# EAGLE board T35_ROMBOARD_V1.00 (EAGLE 6.4)
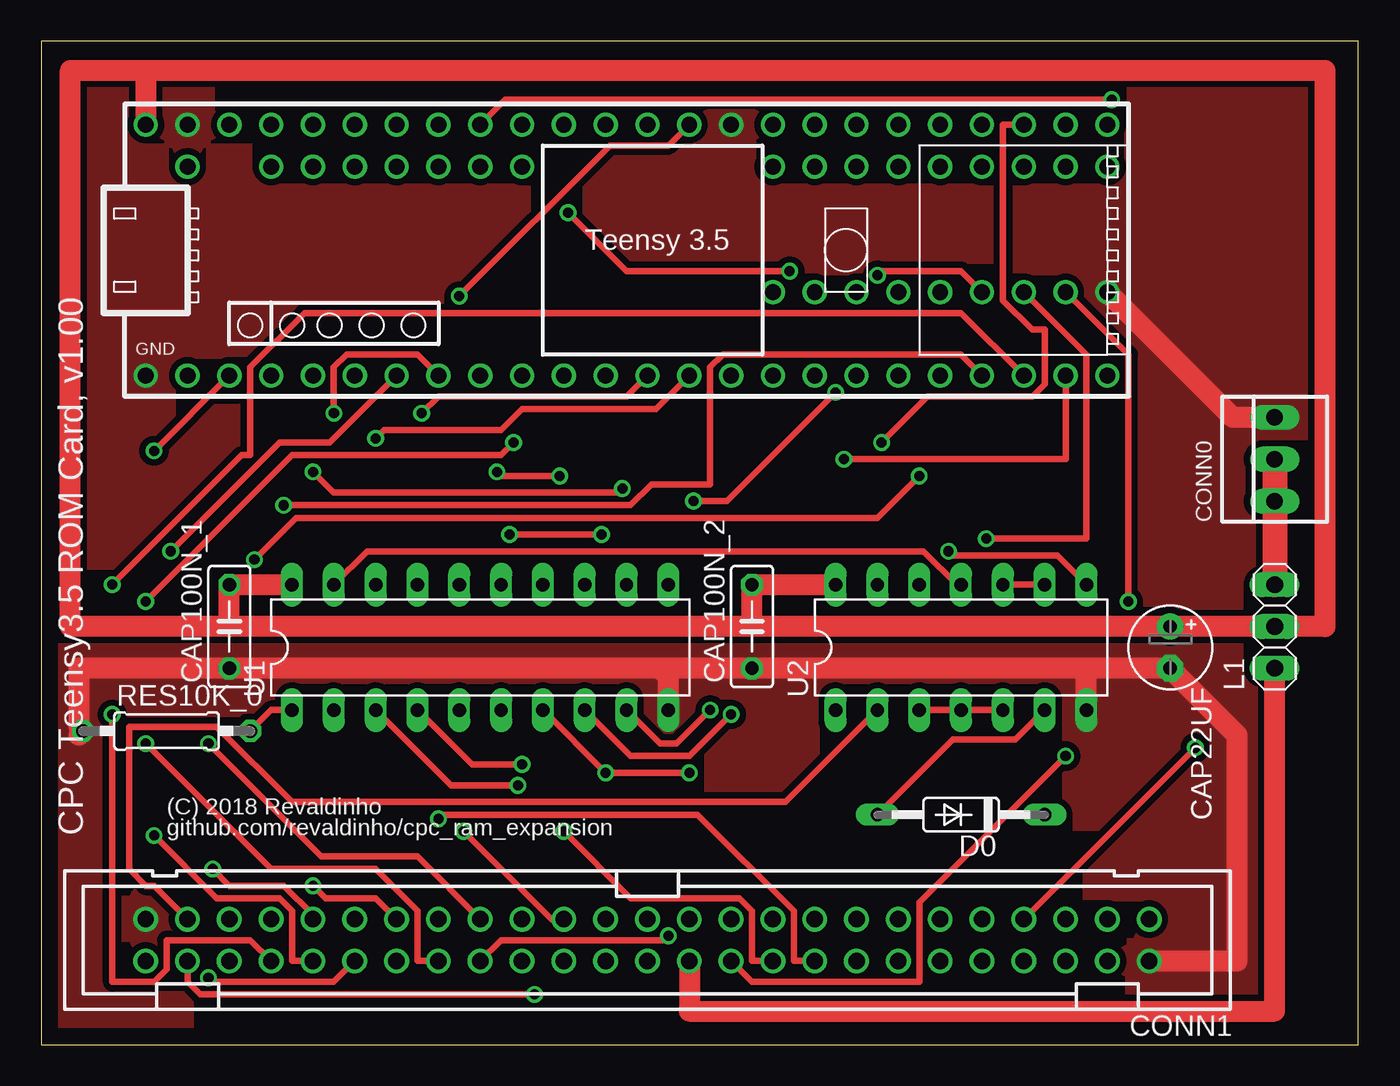
[diagram p0: board, top side]
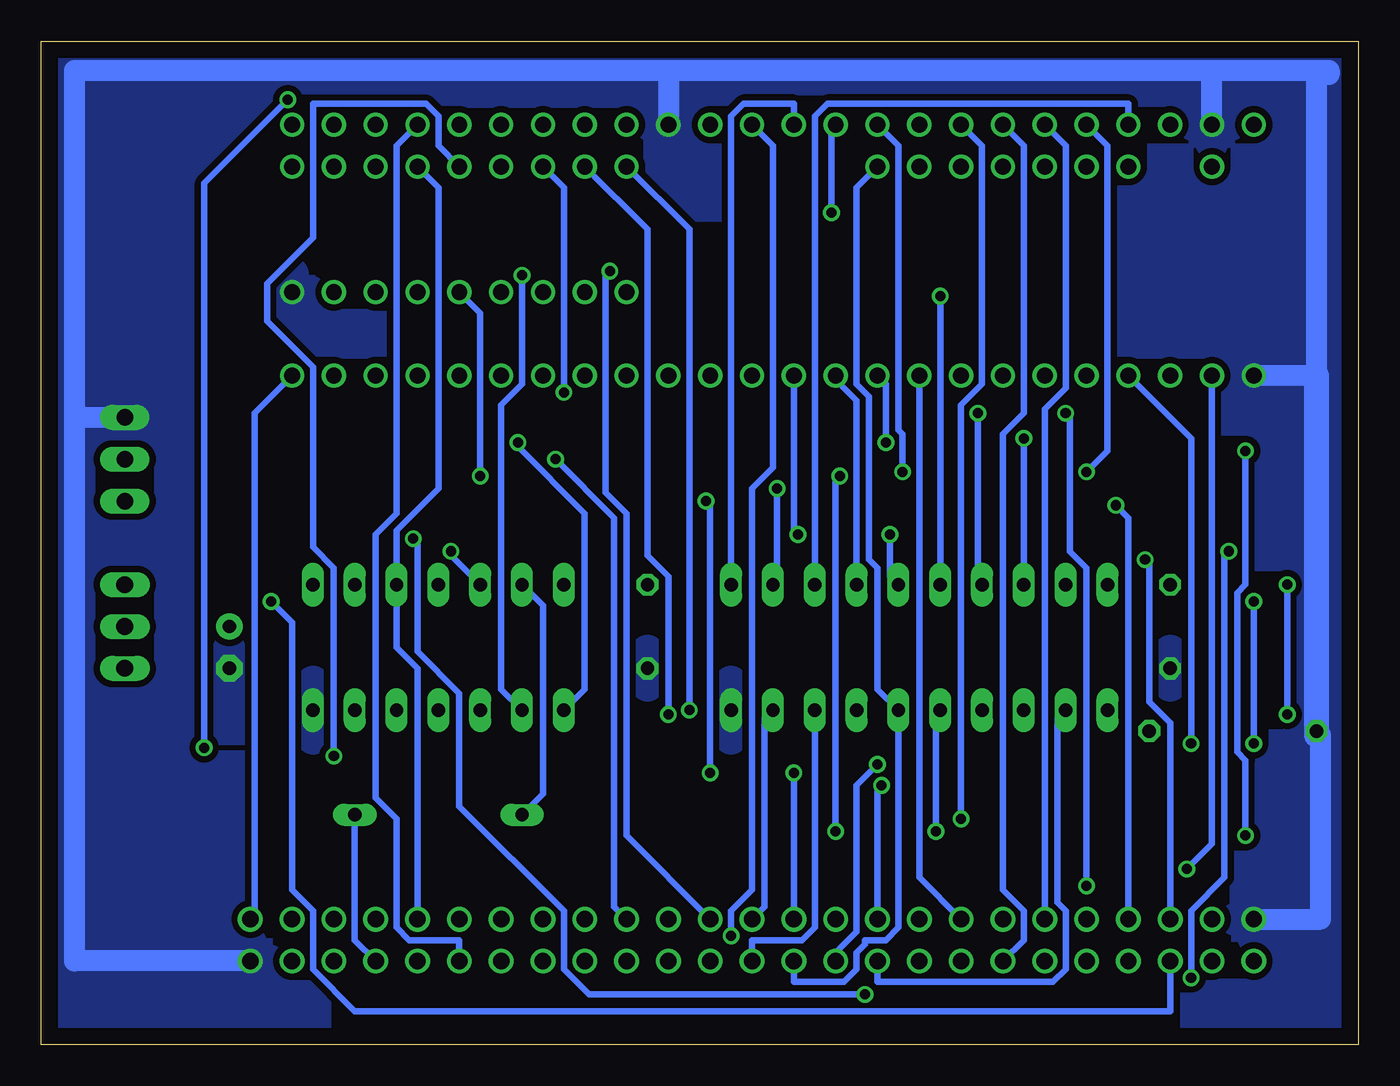
[diagram p1: board, bottom side, seen from below]

Size 80.01 x 60.96 mm. Coordinates in mm from the lower left corner, seen from the top.
Outline: 0,0 80.01,0 80.01,60.96 0,60.96 0,0
Copper layers (1*16): Top 0.035mm / dielectric 1.5mm / Bottom 0.035mm
Design rules "default": minimum track width 10mil, minimum drill 24mil, track to track 8mil, track to pad 8mil, pad to pad 8mil, via to via 8mil, smd to smd 8mil, copper to edge 40mil, drill to drill 8mil, minimum pad ring 10mil, minimum via ring 8mil, stop-mask expansion 4mil, vias tented up to drill 0mil, thermal gap 10mil
Net classes: 0 signal: width 0.381 mm, clearance 0.254 mm; 1 supply: width 1.016 mm, clearance 0.381 mm

## Footprints (pad centres in the part's own frame; a part is rotated, then mirrored left to right if it is on the bottom)
E2,5-5 = drill 0.813 pad 1.6: + -1.27,0 | drill 0.813 pad 1.6 octagon: - 1.27,0
C050-025X075 = drill 0.813 octagon: 1 -2.54,0; 2 2.54,0
22-23-2031 = drill 1 long: 1 -2.54,0; 2 0,0; 3 2.54,0
PAK100/2500-50 = drill 1 pad 1.422: 1 -30.48,-1.27; 2 -30.48,1.27; 3 -27.94,-1.27; 4 -27.94,1.27; 5 -25.4,-1.27; 6 -25.4,1.27; 7 -22.86,-1.27; 8 -22.86,1.27; 9 -20.32,-1.27; 10 -20.32,1.27; 11 -17.78,-1.27; 12 -17.78,1.27; 13 -15.24,-1.27; 14 -15.24,1.27; 15 -12.7,-1.27; 16 -12.7,1.27; 17 -10.16,-1.27; 18 -10.16,1.27; 19 -7.62,-1.27; 20 -7.62,1.27; 21 -5.08,-1.27; 22 -5.08,1.27; 23 -2.54,-1.27; 24 -2.54,1.27; 25 0,-1.27; 26 0,1.27; 27 2.54,-1.27; 28 2.54,1.27; 29 5.08,-1.27; 30 5.08,1.27; 31 7.62,-1.27; 32 7.62,1.27; 33 10.16,-1.27; 34 10.16,1.27; 35 12.7,-1.27; 36 12.7,1.27; 37 15.24,-1.27; 38 15.24,1.27; 39 17.78,-1.27; 40 17.78,1.27; 41 20.32,-1.27; 42 20.32,1.27; 43 22.86,-1.27; 44 22.86,1.27; 45 25.4,-1.27; 46 25.4,1.27; 47 27.94,-1.27; 48 27.94,1.27; 49 30.48,-1.27; 50 30.48,1.27
DO35-10 = drill 0.813 long: A 5.08,0; C -5.08,0
1X03 = drill 1.016 long: 1 -2.54,0; 2 0,0; 3 2.54,0
0207/10 = drill 0.813 octagon: 1 -5.08,0; 2 5.08,0
TEENSY_35_NOXPINS = drill 0.965: 3V3 7.62,-7.62; 3V3_1 30.48,5.08; 3V3_250MA -22.86,7.62; 28 20.32,-7.62; A10 -17.78,5.08; A11 -15.24,5.08; AGND -25.4,7.62; AREF -20.32,5.08; DAC0 12.7,7.62; DAC1 10.16,7.62; GND -27.94,-7.62; GND2 7.62,7.62; GND5 30.48,-2.54; NC1 17.78,5.08; NC2 17.78,-2.54; P0 -25.4,-7.62; P1 -22.86,-7.62; P2 -20.32,-7.62; P3 -17.78,-7.62; P4 -15.24,-7.62; P5 -12.7,-7.62; P6 -10.16,-7.62; P7 -7.62,-7.62; P8 -5.08,-7.62; P9 -2.54,-7.62; P10 0,-7.62; P11 2.54,-7.62; P12 5.08,-7.62; P13 5.08,7.62; P14 2.54,7.62; P15 0,7.62; P16 -2.54,7.62; P17 -5.08,7.62; P18 -7.62,7.62; P19 -10.16,7.62; P20 -12.7,7.62; P21 -15.24,7.62; P22 -17.78,7.62; P23 -20.32,7.62; P24 10.16,-7.62; P25 12.7,-7.62; P26 15.24,-7.62; P27 17.78,-7.62; P29 22.86,-7.62; P30 25.4,-7.62; P31 27.94,-7.62; P32 30.48,-7.62; P33 30.48,7.62; P34 27.94,7.62; P35 25.4,7.62; P36 22.86,7.62; P37 20.32,7.62; P38 17.78,7.62; P39 15.24,7.62; P40 10.16,-2.54; P41 12.7,-2.54; P42 15.24,-2.54; P43 20.32,-2.54; P44 22.86,-2.54; P45 25.4,-2.54; P46 27.94,-2.54; P47 27.94,5.08; P48 25.4,5.08; P49 22.86,5.08; P50 20.32,5.08; P51 15.24,5.08; P52 12.7,5.08; P53 10.16,5.08; P54 -5.08,5.08; P55 -7.62,5.08; P56 -10.16,5.08; P57 -12.7,5.08; VIN -27.94,7.62; VUSB -25.4,5.08
DIL20 = drill 0.813 long: 1 -11.43,-3.81; 2 -8.89,-3.81; 3 -6.35,-3.81; 4 -3.81,-3.81; 5 -1.27,-3.81; 6 1.27,-3.81; 7 3.81,-3.81; 8 6.35,-3.81; 9 8.89,-3.81; 10 11.43,-3.81; 11 11.43,3.81; 12 8.89,3.81; 13 6.35,3.81; 14 3.81,3.81; 15 1.27,3.81; 16 -1.27,3.81; 17 -3.81,3.81; 18 -6.35,3.81; 19 -8.89,3.81; 20 -11.43,3.81
DIL14 = drill 0.813 long: 1 -7.62,-3.81; 2 -5.08,-3.81; 3 -2.54,-3.81; 4 0,-3.81; 5 2.54,-3.81; 6 5.08,-3.81; 7 7.62,-3.81; 8 7.62,3.81; 9 5.08,3.81; 10 2.54,3.81; 11 0,3.81; 12 -2.54,3.81; 13 -5.08,3.81; 14 -7.62,3.81

## Placement (x,y rotation side)
CAP22UF  [E2,5-5]  68.58,24.13 270 top
CAP100N_1  [C050-025X075]  11.43,25.4 90 top
CAP100N_2  [C050-025X075]  43.18,25.4 90 top
CONN0  [22-23-2031]  74.93,35.56 90 top
CONN1  [PAK100/2500-50]  36.83,6.35 180 top
D0  [DO35-10]  55.88,13.97 180 top
L1  [1X03]  74.93,25.4 90 top
RES10K_0  [0207/10]  7.62,19.05 0 top
U0  [TEENSY_35_NOXPINS]  34.29,48.26 0 top
U1  [DIL20]  26.67,24.13 0 top
U2  [DIL14]  55.88,24.13 0 top

## Library data of the parts
CAP22UF CAP100N_1 CAP100N_2 RES10K_0 = resistor
CONN0 = con-molex
CONN1 = con-3m
D0 = diode
L1 = pinhead
U0 = Teensy35
U1 U2 = ic-package

## Nets
A0: CONN1.33 U0.P2
A1: CONN1.34 U0.P14
A2: CONN1.35 U0.P7
A3: CONN1.36 U0.P8
A4: CONN1.37 U0.P6
A5: CONN1.38 U0.P20
A6: CONN1.39 U0.P21
A7: CONN1.40 U0.P5
A8: CONN1.41 U0.P0
A9: CONN1.42 U0.P1
A10: CONN1.43 U0.P29
A11: CONN1.44 U0.P30
A12: CONN1.45 U0.P43
A13: CONN1.46 U0.P46
A14: CONN1.47 U0.P44 U2.2
A15: CONN1.48 U0.P45
BUFOE_B: U1.19 U2.11
BUSACK_B: CONN1.13
BUSRESET_B: CONN1.11
BUSRQ_B: CONN1.14
CLK: CONN1.1 U0.P32
CURSOR: CONN1.5
D0: CONN1.25 U0.P53 U1.9
D1: CONN1.26 U0.P52 U1.8
D2: CONN1.27 U0.P51 U1.7
D3: CONN1.28 U0.P54 U1.6
D4: CONN1.29 U1.5
D5: CONN1.30 U1.4
D6: CONN1.31 U1.3
D7: CONN1.32 U1.2
DOUT0: U0.P15 U1.11
DOUT1: U0.P22 U1.12
DOUT2: U0.P23 U1.13
DOUT3: U0.P9 U1.14
DOUT4: U0.P10 U1.15
DOUT5: U0.P13 U1.16
DOUT6: U0.P11 U1.17
DOUT7: U0.P12 U1.18
EXP_B: CONN1.3
HALT_B: CONN1.17
INT_B: CONN1.16
IOREQ_B: CONN1.20 U0.P17
LPEN: CONN1.4
M1_B: CONN1.22 U0.P50
MREQ_B: CONN1.23 U0.P16
NMI_B: CONN1.15
RAMDIS: CONN1.6
RAMRD_B: CONN1.7 U0.P18
RD_B: CONN1.19 U0.P31
READY: CONN1.12 U0.P36
RESET_B: CONN1.10
RFSH_B: CONN1.21
ROMDIS: CONN1.8 D0.C
ROMDIS_B: U2.3 U2.4 U2.5
ROMDIS_PRE: D0.A U2.6 U2.13
ROMEN: U2.8 U2.12
ROMEN_B: CONN1.9 U0.P49 U2.9 U2.10
ROMVALID: U0.P35 U2.1
SOUND: CONN1.50
VDD [supply]: CAP22UF.+ CAP100N_1.2 CAP100N_2.2 L1.2 U0.VIN U1.20 U2.14
VDD_CPC [supply]: CONN1.24 L1.1
VDD_EXT [supply]: CONN0.1 CONN0.2 L1.3
VSS [supply]: CAP22UF.- CAP100N_1.1 CAP100N_2.1 CONN0.3 CONN1.2 CONN1.49 RES10K_0.1 U0.AGND U0.GND U0.GND2 U0.GND5 U1.10 U2.7
VSS_PULLDOWN: RES10K_0.2 U1.1
WR_B: CONN1.18 U0.P19

## Tracks (layer width: path | path; a pad name or v marks a point on that pad's centre or on a via)
A0  (via drill 0.61)
  Top 0.381: v10.16,18.29 17.02,11.43 22.86,11.43 CONN1.33
  Bottom 0.381: U0.P2 10.16,36.83 v10.16,18.29
A1  (via drill 0.61)
  Top 0.381: v38.1,6.6 37.85,6.35 27.94,6.35 CONN1.34
  Bottom 0.381: U0.P14 35.56,54.61 35.56,35.05 36.83,33.78 36.83,9.4 38.1,8.13 v38.1,6.6
A2
  Bottom 0.381: U0.P7 26.67,10.16 CONN1.35
A3  (via drill 0.61)
  Top 0.381: v28.7,36.58 27.94,35.81 15.24,35.81 v6.35,26.92 | v6.35,18.29 13.97,10.67 20.32,10.67 22.86,8.13 22.86,5.08 CONN1.36
  Bottom 0.381: U0.P8 28.7,40.13 v28.7,36.58 | v6.35,18.29 v6.35,26.92
A4  (via drill 0.61)
  Top 0.381: U0.P6 22.86,41.91 18.54,41.91 17.78,41.15 v17.78,38.35 | v16.51,9.65 17.27,8.89 20.32,8.89 CONN1.37
  Bottom 0.381: v17.78,38.35 17.53,38.1 17.53,29.97 16.51,28.96 v16.51,9.65
A5
  Bottom 0.381: U0.P20 20.32,54.61 20.32,38.35 21.59,37.08 21.59,9.4 20.32,8.13 20.32,6.35 CONN1.38
A6
  Bottom 0.381: U0.P21 17.78,54.61 17.78,39.88 19.05,38.61 CONN1.39
A7  (via drill 0.61)
  Top 0.381: U0.P5 17.53,36.58 14.48,36.58 v7.87,29.97 | v10.16,4.06 10.41,3.81 17.78,3.81 CONN1.40
  Bottom 0.381: v7.87,29.97 8.13,29.72 8.13,10.16 10.16,8.13 v10.16,4.06
A8  (via drill 0.61)
  Top 0.381: v10.41,10.67 11.43,9.65 14.73,9.65 16.51,7.87 CONN1.41
  Bottom 0.381: U0.P0 8.89,12.19 v10.41,10.67
A9  (via drill 0.61)
  Top 0.381: v6.86,36.07 U0.P1 | v6.86,12.7 10.67,8.89 14.48,8.89 15.24,8.13 15.24,5.08 CONN1.42
  Bottom 0.381: v6.86,36.07 6.86,27.94 7.37,27.43 7.37,17.78 6.86,17.27 v6.86,12.7
A10  (via drill 0.61)
  Top 0.381: U0.P29 55.88,41.91 41.4,41.91 40.64,41.15 40.64,34.04 37.08,34.04 35.81,32.77 v14.73,32.77
  Bottom 0.381: v14.73,32.77 13.97,32 CONN1.43
A11  (via drill 0.61)
  Top 0.381: U0.P30 55.88,44.45 16,44.45 12.7,41.15 12.7,35.81 12.19,35.81 v4.32,27.94 | v4.32,20.07 4.32,3.81 6.86,3.81 7.62,4.57 7.62,6.35 12.7,6.35 CONN1.44
  Bottom 0.381: v4.32,20.07 v4.32,27.94
A12  (via drill 0.61)
  Top 0.381: v53.34,34.54 50.8,32 15.49,32 v12.95,29.46
  Bottom 0.381: U0.P43 53.34,44.45 v53.34,34.54 | v12.95,29.46 12.7,29.21 12.7,20.83 11.43,19.56 CONN1.45
A13  (via drill 0.61)
  Top 0.381: U0.P46 66.04,41.91 v66.04,26.92
  Bottom 0.381: v66.04,26.92 64.77,25.65 64.77,9.4 63.5,8.13 63.5,4.57 60.96,2.03 11.43,2.03 CONN1.46
A14  (via drill 0.61)
  Top 0.381: v50.8,46.74 51.05,46.99 55.88,46.99 U0.P44 | CONN1.47 6.86,9.65 6.35,9.65 5.33,10.67 5.33,19.3 10.67,19.3 15.24,14.73 45.21,14.73 U2.2
  Bottom 0.381: U2.2 52.07,21.59 52.07,38.86 50.8,40.13 v50.8,46.74
A15  (via drill 0.61)
  Top 0.381: U0.P45 63.5,41.91 63.5,30.73 v57.4,30.73 | v29.97,3.05 9.65,3.05 8.89,3.81 CONN1.48
  Bottom 0.381: v57.4,30.73 57.15,30.48 57.15,23.88 54.61,21.34 54.61,14.48 48.26,8.13 48.26,4.57 46.74,3.05 v29.97,3.05
BUFOE_B
  Top 0.381: U1.19 19.81,29.97 53.59,29.97 55.63,27.94 U2.11
CLK
  Bottom 0.381: U0.P32 67.06,38.35 67.06,7.87 CONN1.1
D0  (via drill 0.61)
  Top 0.381: v40.64,20.32 38.61,18.29 37.59,18.29 U1.9
  Bottom 0.381: U1.9 36.07,19.81 36.07,8.38 CONN1.25 | U0.P53 40.64,49.53 v40.64,20.32
D1  (via drill 0.61)
  Top 0.381: v41.91,20.07 39.37,17.53 35.81,17.53 U1.8
  Bottom 0.381: U1.8 33.02,7.11 33.78,6.35 36.83,6.35 CONN1.26 | U0.P52 43.18,49.53 43.18,29.72 41.91,28.45 v41.91,20.07
D2  (via drill 0.61)
  Top 0.381: U1.7 v34.29,16.51 v39.37,16.51 | v48.26,39.62 41.66,33.02 v39.62,33.02
  Bottom 0.381: CONN1.27 v34.29,16.51 | U0.P51 48.26,52.07 v48.26,39.62 | v39.62,33.02 39.37,32.77 v39.37,16.51
D3
  Bottom 0.381: CONN1.28 34.29,3.81 31.24,3.81 30.48,4.57 30.48,5.59 29.97,6.1 29.97,6.35 28.7,6.35 27.94,7.11 U1.6 29.21,21.59 29.21,28.96 29.72,29.46 29.72,39.37 30.48,40.13 30.48,52.07 U0.P54
D4  (via drill 0.61)
  Top 0.381: v25.65,12.95 30.99,7.62 CONN1.29
  Bottom 0.381: U1.5 25.65,20.07 v25.65,12.95
D5  (via drill 0.61)
  Top 0.381: U1.4 26.16,17.02 v29.21,17.02
  Bottom 0.381: v29.21,17.02 30.48,15.75 30.48,6.86 31.75,5.59 CONN1.30
D6  (via drill 0.61)
  Top 0.381: U1.3 24.89,15.75 v28.96,15.75
  Bottom 0.381: v28.96,15.75 29.21,15.49 CONN1.31
D7
  Bottom 0.381: U1.2 18.29,19.81 18.29,8.64 17.78,8.13 17.78,4.57 18.54,3.81 29.21,3.81 CONN1.32
DOUT0
  Bottom 0.381: U1.11 38.1,56.39 37.34,57.15 34.29,57.15 U0.P15
DOUT1  (via drill 0.61)
  Top 0.381: v35.31,33.78 35.05,33.53 17.78,33.53 v16.51,34.8
  Bottom 0.381: U1.12 35.31,28.19 v35.31,33.78 | v16.51,34.8 15.24,36.07 15.24,54.61 U0.P22
DOUT2
  Bottom 0.381: U1.13 33.02,56.39 32.26,57.15 13.97,57.15 U0.P23
DOUT3
  Bottom 0.381: U1.14 30.48,39.12 31.75,40.39 U0.P9
DOUT4  (via drill 0.61)
  Top 0.381: v34.04,30.99 v28.45,30.99
  Bottom 0.381: U1.15 28.45,28.45 v28.45,30.99 | v34.04,30.99 34.29,31.24 U0.P10
DOUT5  (via drill 0.61)
  Top 0.381: v25.4,45.47 34.54,54.61 38.1,54.61 U0.P13
  Bottom 0.381: v25.4,45.47 U1.16
DOUT6  (via drill 0.61)
  Top 0.381: v23.11,38.35 24.13,39.37 35.56,39.37 U0.P11
  Bottom 0.381: U1.17 23.11,28.19 v23.11,38.35
DOUT7  (via drill 0.61)
  Top 0.381: v20.32,36.83 20.83,37.34 27.94,37.34 29.21,38.61 37.34,38.61 U0.P12
  Bottom 0.381: v20.32,36.83 U1.18
IOREQ_B  (via drill 0.61)
  Top 0.381: v27.69,34.8 27.94,34.54 v31.5,34.54 | v31.75,12.95 35.81,8.89 42.42,8.89 43.18,8.13 43.18,5.08 CONN1.20
  Bottom 0.381: U0.P17 27.94,54.61 27.94,37.34 27.69,37.08 v27.69,34.8 | v31.5,34.54 31.75,34.29 v31.75,12.95
M1_B  (via drill 0.61)
  Top 0.381: v62.23,17.53 53.34,8.64 53.34,3.81 43.18,3.81 CONN1.22
  Bottom 0.381: U0.P50 55.88,54.61 55.88,56.39 56.64,57.15 63.5,57.15 63.5,49.02 66.29,46.23 66.29,43.94 63.5,41.15 63.5,30.23 62.23,28.96 v62.23,17.53
MREQ_B  (via drill 0.61)
  Top 0.381: v32,50.55 35.56,46.99 v45.47,46.99
  Bottom 0.381: U0.P16 32,55.63 v32,50.55 | v45.47,46.99 45.72,46.74 45.72,33.53 44.45,32.26 44.45,12.7 CONN1.23
RAMRD_B  (via drill 0.61)
  Top 0.381: U0.P18 28.19,57.4 v65.02,57.4 | CONN1.7 v70.1,18.03
  Bottom 0.381: v65.02,57.4 70.1,52.32 v70.1,18.03
RD_B  (via drill 0.61)
  Top 0.381: U0.P31 62.23,35.56 v48.77,35.56
  Bottom 0.381: v48.77,35.56 45.21,32 45.21,8.38 CONN1.19
READY
  Bottom 0.381: U0.P36 58.42,54.61 58.42,32.26 59.69,30.99 59.69,14.99 58.42,13.72 58.42,7.11 57.66,6.35 54.61,6.35 CONN1.12
ROMDIS
  Bottom 0.381: D0.C 60.96,6.35 CONN1.8
ROMDIS_B
  Top 0.381: U2.3 U2.4 U2.5
ROMDIS_PRE
  Top 0.381: D0.A 55.37,18.54 59.18,18.54 U2.6
  Bottom 0.381: U2.13 49.53,26.67 49.53,15.24 D0.A
ROMEN  (via drill 0.61)
  Top 0.381: v55.12,29.97 55.37,29.72 61.72,29.72 U2.8
  Bottom 0.381: U2.12 55.12,29.72 v55.12,29.97
ROMEN_B
  Top 0.381: U2.9 U2.10
  Bottom 0.381: U0.P49 55.88,52.07 55.88,33.78 58.42,31.24 U2.10 58.42,24.13 57.15,22.86 CONN1.9
ROMVALID  (via drill 0.61)
  Top 0.381: v51.05,36.58 53.85,39.37 60.2,39.37 60.96,40.13 60.96,43.43 60.2,43.43 58.42,45.21 58.42,55.88 U0.P35
  Bottom 0.381: U2.1 46.99,21.59 46.99,32.26 51.05,36.32 v51.05,36.58
VDD
  Top 1.27: 43.18,25.4 CAP22UF.+ L1.2 77.98,25.4 77.98,59.18 6.35,59.18 | 43.18,25.4 11.43,25.4 | 11.43,25.4 1.78,25.4 1.78,59.18 6.35,59.18 | 6.35,59.18 U0.VIN | U1.20 CAP100N_1.2 11.43,25.4 | U2.14 CAP100N_2.2 43.18,25.4
VDD_CPC
  Top 1.27: L1.1 74.93,2.03 39.37,2.03 CONN1.24
VDD_EXT
  Top 1.524: CONN0.2 CONN0.1 L1.3
VSS
  Top 1.27: U0.GND5 72.39,38.1 CONN0.3 | CONN1.2 72.64,5.08 72.64,18.8 CAP22UF.- 63.25,22.86 | U2.7 63.5,22.61 63.25,22.86 | U1.10 38.1,22.35 37.59,22.86 | 63.25,22.86 CAP100N_2.1 37.59,22.86 | 37.59,22.86 CAP100N_1.1 2.29,22.86 2.29,19.3 RES10K_0.1 2.29,18.8
  Bottom 1.27: 77.98,38.1 77.98,5.08 CONN1.2 | 77.98,38.1 77.98,59.18 41.91,59.18 | 41.91,59.18 8.89,59.18 | 8.89,59.18 1.78,59.18 1.78,58.93 2.54,58.93 2.54,40.64 U0.GND | U0.AGND 8.89,59.18 | CONN0.3 77.98,38.1 | 41.91,59.18 U0.GND2 | CONN1.49 2.29,7.62 2.29,18.8
  Bottom 1.524: 2.54,40.64 2.54,18.8
  pour Top: 0,0 0,60.96 80.01,60.96 80.01,0
  pour Bottom: 0,0 0,60.96 80.01,60.96 80.01,0
VSS_PULLDOWN
  Top 0.381: RES10K_0.2 13.97,20.32 U1.1
WR_B  (via drill 0.61)
  Top 0.381: v24.13,13.72 24.38,13.97 39.88,13.97 45.72,8.13 45.72,5.08 CONN1.18
  Bottom 0.381: U0.P19 22.86,54.61 22.86,40.13 24.13,38.86 v24.13,13.72

## Text on the board
tPlace: (C) 2018 Revaldinho | CPC Teensy3.5 ROM Card, v1.00 | github.com/revaldinho/cpc_ram_expansion